# EAGLE board TaylorReceiverSchem (EAGLE 7.2.0)
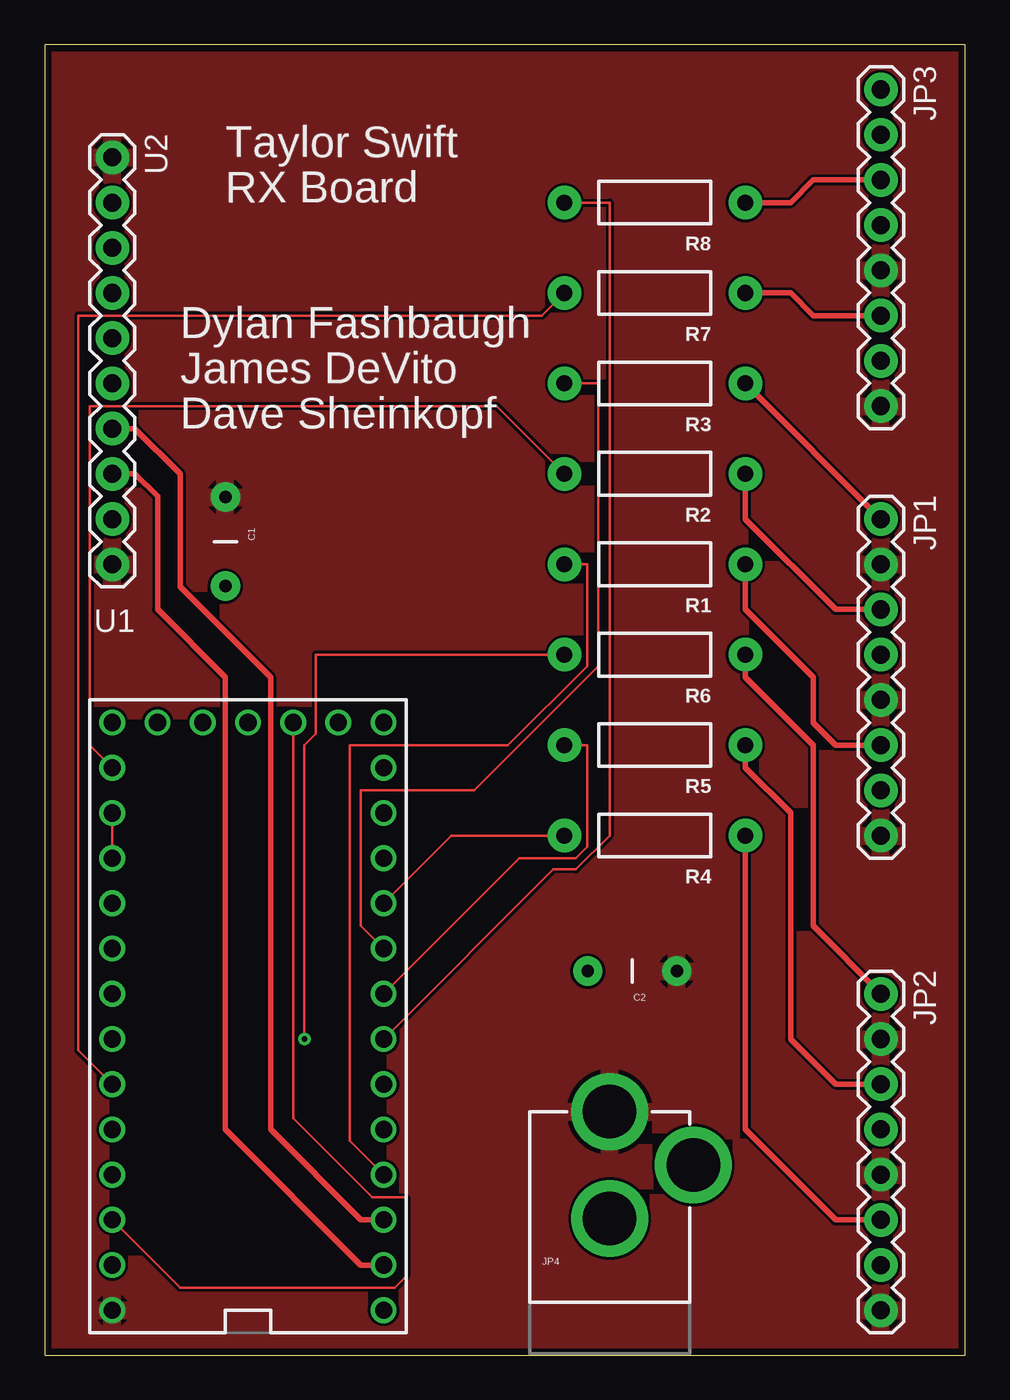
[diagram p0: board, top side]
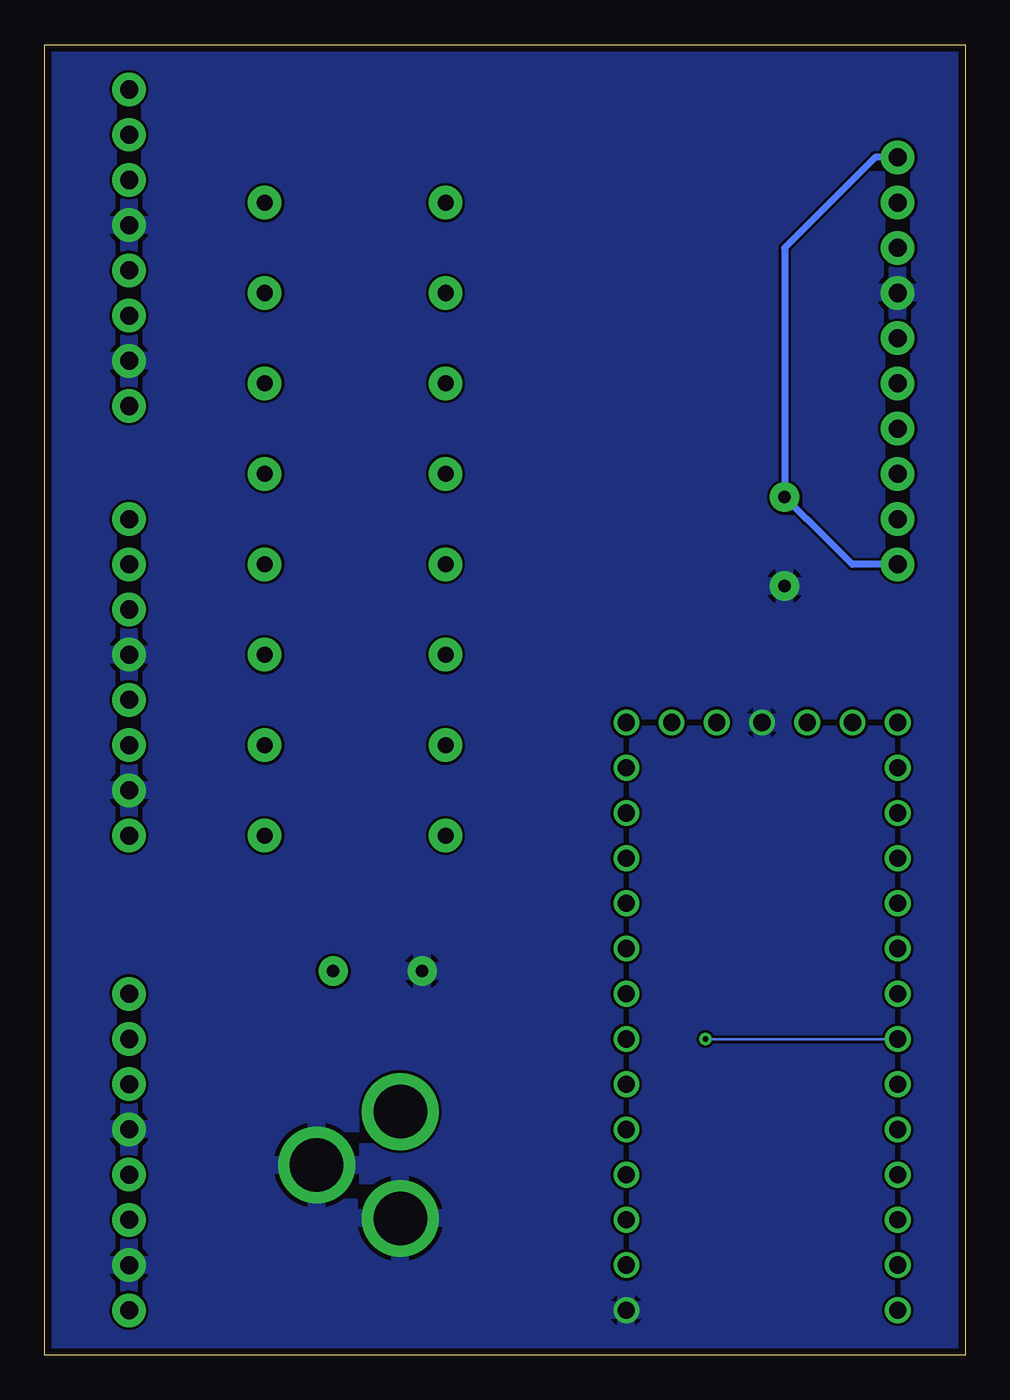
[diagram p1: board, bottom side, seen from below]

Size 51.74 x 73.65 mm. Coordinates in mm from the lower left corner, seen from the top.
Outline: 0,0 51.74,0 51.74,73.65 0,73.65 0,0
Copper layers (1*16): Top 0.0356mm / dielectric 1.5011mm / Bottom 0.0356mm
Design rules "LaenPCBOrder": minimum track width 6mil, minimum drill 13mil, track to track 6mil, track to pad 6mil, pad to pad 6mil, via to via 6mil, smd to smd 6mil, copper to edge 15mil, drill to drill 6mil, minimum pad ring 7mil, minimum via ring 7mil, stop-mask expansion 3mil, vias tented up to drill 0mil, thermal gap 10mil

## Footprints (pad centres in the part's own frame; a part is rotated, then mirrored left to right if it is on the bottom)
CAP-PTH-5MM = drill 0.7 pad 1.651: 1 -2.5,0; 2 2.5,0
1X08_ROUND = drill 1.016 pad 1.88: 1 0,0; 2 2.54,0; 3 5.08,0; 4 7.62,0; 5 10.16,0; 6 12.7,0; 7 15.24,0; 8 17.78,0
POWER_JACK_PTH = drill 2.997 pad 4.318: GND 0,7.7; GNDBREAK 4.7,10.7; PWR 0,13.7
AXIAL-0.4 = drill 0.9 pad 1.88: P$1 -5.08,0; P$2 5.08,0
TEENSY_3.1_BASIC = drill 0.965: 0 -7.62,13.97; 1 -7.62,11.43; 2 -7.62,8.89; 3 -7.62,6.35; 3.3V 7.62,11.43; 3.3V1 -2.54,-16.51; 4 -7.62,3.81; 5 -7.62,1.27; 6 -7.62,-1.27; 7 -7.62,-3.81; 8 -7.62,-6.35; 9 -7.62,-8.89; 10 -7.62,-11.43; 11 -7.62,-13.97; 12 -7.62,-16.51; 13 7.62,-16.51; 14/A0 7.62,-13.97; 15/A1 7.62,-11.43; 16/A2 7.62,-8.89; 17/A3 7.62,-6.35; 18/A4 7.62,-3.81; 19/A5 7.62,-1.27; 20/A6 7.62,1.27; 21/A7 7.62,3.81; 22/A8 7.62,6.35; 23/A9 7.62,8.89; A14 5.08,-16.51; AGND 7.62,13.97; GND -7.62,16.51; GND1 0,-16.51; PGM 2.54,-16.51; VBAT -5.08,-16.51; VIN 7.62,16.51
1X10 = drill 1.016 pad 1.88: 1 0,0; 2 2.54,0; 3 5.08,0; 4 7.62,0; 5 10.16,0; 6 12.7,0; 7 15.24,0; 8 17.78,0; 9 20.32,0; 10 22.86,0

## Placement (x,y rotation side)
C1  [CAP-PTH-5MM]  10.16,45.72 270 top
C2  [CAP-PTH-5MM]  33.02,21.59 180 top
JP1  [1X08_ROUND]  46.99,46.99 270 top
JP2  [1X08_ROUND]  46.99,20.32 270 top
JP3  [1X08_ROUND]  46.99,71.12 270 top
JP4  POWER_JACKPTH  [POWER_JACK_PTH]  31.75,0 0 top
R1  [AXIAL-0.4]  34.29,44.45 180 top
R2  [AXIAL-0.4]  34.29,49.53 180 top
R3  [AXIAL-0.4]  34.29,54.61 180 top
R4  [AXIAL-0.4]  34.29,29.21 180 top
R5  [AXIAL-0.4]  34.29,34.29 180 top
R6  [AXIAL-0.4]  34.29,39.37 180 top
R7  [AXIAL-0.4]  34.29,59.69 180 top
R8  [AXIAL-0.4]  34.29,64.77 180 top
U1  TEENSY_3.1_BASIC  [TEENSY_3.1_BASIC]  11.43,19.05 180 top
U2  XBEE_ADAPTER_KIT  [1X10]  3.81,67.31 270 top

## Library data of the parts
C1 C2 = SparkFun-Capacitors
JP1-JP3 = SparkFun-Connectors
JP4 = SparkFun-Connectors; PROD_ID: CONN-08197
R1-R8 = SparkFun-Resistors
U1 = Teensy_3_Series_Board_v1.0
U2 = Nanotronics

## Nets
3.3V: U1.3.3V U1.3.3V1
AGND: U1.AGND
GND: C1.2 C2.2 JP1.4 JP1.7 JP2.4 JP2.7 JP3.4 JP3.7 JP4.GND JP4.GNDBREAK U1.GND U1.GND1 U2.4
N$1: U1.15/A1 U1.16/A2
N$4: U1.0 U2.8
N$5: U1.1 U2.7
N$6: JP1.6 R1.P$1
N$7: JP1.3 R2.P$1
N$8: JP1.1 R3.P$1
N$9: JP2.6 R4.P$1
N$10: JP2.3 R5.P$1
N$11: JP2.1 R6.P$1
N$12: JP3.6 R7.P$1
N$13: JP3.3 R8.P$1
STRIP1: R1.P$2 U1.2
STRIP2: R2.P$2 U1.14/A0
STRIP3: R3.P$2 U1.7
STRIP4: R4.P$2 U1.8
STRIP5: R5.P$2 U1.6
STRIP6: R6.P$2 U1.20/A6
STRIP7: R7.P$2 U1.21/A7
STRIP8: R8.P$2 U1.5
VBAT: U1.VBAT
VCC: C1.1 C2.1 JP1.2 JP1.5 JP1.8 JP2.2 JP2.5 JP2.8 JP3.5 JP3.8 JP4.PWR U1.VIN U2.1 U2.10

## Tracks (layer width: path | path; a pad name or v marks a point on that pad's centre or on a via)
3.3V
  Top 0.152: U1.3.3V 7.62,3.81 19.68,3.81 20.32,4.45 20.32,8.89 18.41,8.89 13.97,13.34 U1.3.3V1
GND
  pour Bottom: -26.67,-13.97 -26.67,87.63 71.12,87.63 71.12,-16.51 -26.67,-16.51
N$1
  Top 0.152: U1.15/A1 U1.16/A2
N$4
  Top 0.305: U2.8 5.08,49.53 6.35,48.26 6.35,41.91 10.16,38.1 10.16,12.7 17.78,5.08 U1.0
N$5
  Top 0.305: U2.7 5.08,52.07 7.62,49.53 7.62,43.18 12.7,38.1 12.7,12.7 17.78,7.62 U1.1
N$6
  Top 0.305: R1.P$1 39.37,41.91 43.18,38.1 43.18,35.56 44.45,34.29 JP1.6
N$7
  Top 0.305: R2.P$1 39.37,46.99 44.45,41.91 JP1.3
N$8
  Top 0.305: R3.P$1 JP1.1
N$9
  Top 0.305: R4.P$1 39.37,12.7 44.45,7.62 JP2.6
N$10
  Top 0.305: R5.P$1 39.37,33.02 41.91,30.48 41.91,17.78 44.45,15.24 JP2.3
N$11
  Top 0.305: R6.P$1 39.37,38.1 43.18,34.29 43.18,24.13 JP2.1
N$12
  Top 0.305: R7.P$1 41.91,59.69 43.18,58.42 JP3.6
N$13
  Top 0.305: R8.P$1 41.91,64.77 43.18,66.04 JP3.3
STRIP1
  Top 0.152: U1.2 17.14,12.06 17.14,34.29 26.04,34.29 30.48,38.73 30.48,44.45 R1.P$2
STRIP2
  Top 0.152: U1.14/A0 2.54,34.29 2.54,53.34 25.4,53.34 R2.P$2
STRIP3
  Top 0.152: U1.7 17.78,24.13 17.78,31.75 24.13,31.75 31.11,38.73 31.11,54.61 R3.P$2
STRIP4
  Top 0.152: U1.8 22.86,29.21 R4.P$2
STRIP5
  Top 0.152: U1.6 26.67,27.94 29.84,27.94 30.48,28.57 30.48,34.29 R5.P$2
STRIP6  (via drill 0.33)
  Top 0.152: v14.61,17.78 14.61,34.29 15.24,34.92 15.24,39.37 R6.P$2
  Bottom 0.152: v14.61,17.78 U1.20/A6
STRIP7
  Top 0.152: U1.21/A7 1.91,17.14 1.91,58.42 27.94,58.42 R7.P$2
STRIP8
  Top 0.152: U1.5 28.57,27.3 29.84,27.3 31.75,29.21 31.75,64.77 R8.P$2
VCC
  Bottom 0.406: U2.10 6.35,44.45 8.89,46.99 8.93,46.99 C1.1 10.16,62.23 5.08,67.31 U2.1
  pour Top: -20.32,-8.89 -20.32,82.55 66.04,82.55 66.04,-8.89

## Text on the board
tPlace: Taylor Swift | RX Board | Dylan Fashbaugh | James DeVito | Dave Sheinkopf